# Altium PCB linkit-v4-0.3_6layers_smdonly.PcbDoc (part 3 of 5)
Units mil, origin at the board's own origin, x right, y up, seen from the top; angles counter-clockwise.
Board outline 2755.93 x 1377.98 mil, 6 copper layers (Top Layer, Int1 (GND), Int2 (Sign), Int3 (Sign), Int4 (PWR), Bottom Layer), stack 64.425 mil thick; 199 components, 156 nets, 686 pads, 678 vias.
Unrouted connection lines stored in the file: 1.
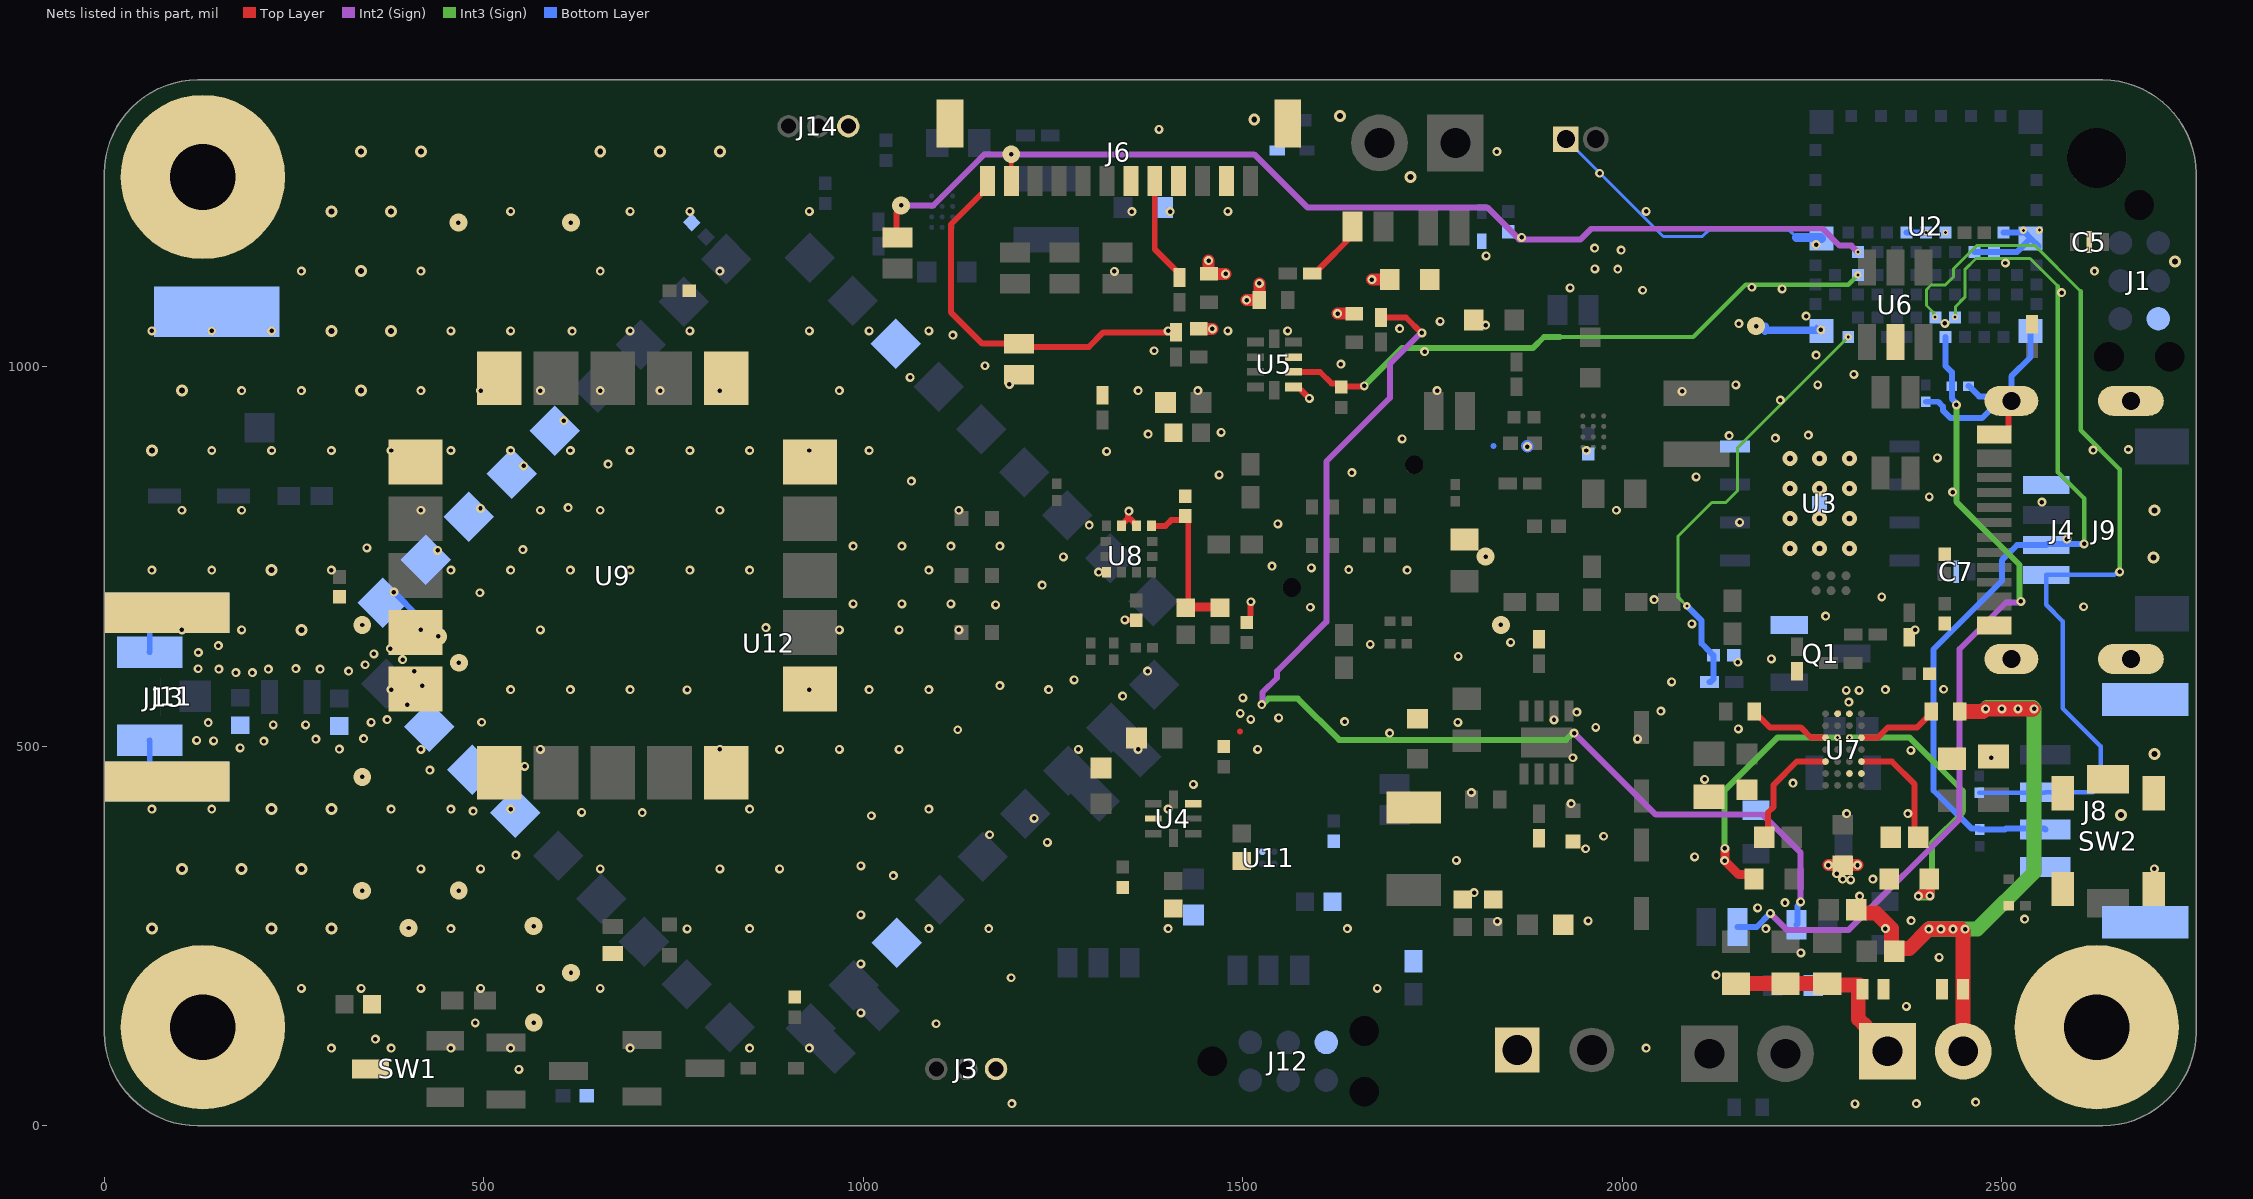
[diagram p6: the nets of this part, all layers, seen from the top]

## Part data (continued)
R25: library part "RES 1.6K 0201 1% 100PPM", "RES 1.6K 0201 1% 100PPM", Supplier Part Number 1=71-CRCW02011K60FKED, TOLERANCE=1%, PPM=100, Size=0201, Supplier 1=Mouser, Supplier 2=Digi-Key, Supplier Part Number 2=541-1.60KAABCT-ND
R26: library part RES-NC-0402, "Generic Resistor, Not Fitted", Manufacturer=YAGEO, Manufacturer_Part_Number=RC0402JR-070RL, Package=R0402, ComponentLink1Description=Datasheet, ComponentLink1URL=http://tunmcdsvn.tun.st.com/Component_Datasheet_Library/Trunk/Resistors/Yageo_Resistor_RC0402-series, Initial_Board_Reference=MB1274, Internal_Part_Number=MCD-00052, part_type=Resistor, Provided_By=SUBCO, status=Released
R31: library part "RES 0R 0402", "RES 0R 0402", Supplier Part Number 1=603-RC0402JR-070RL, Size=0402, Supplier 1=Mouser, Supplier 2=Digi-Key, Supplier Part Number 2=311-0.0JRCT-ND
R33 R34: "Thick Film Resistors - SMD 1/20watt 5.1Kohms 5% 200ppm", Manufacturer_Name=Vishay, Mouser Part Number=71-CRCW02015K10JNED, Datasheet Link=http://www.vishay.com/docs/20035/dcrcwe3.pdf, Height=0.28mm, Manufacturer_Part_Number=CRCW02015K10JNED, Mouser Price/Stock=https://www.mouser.com/Search/Refine.aspx?Keyword=71-CRCW02015K10JNED
R35: library part CRCW04020000Z0EEHP, "Thick Film Resistors - SMD CRCW 402 jumper", Manufacturer_Name=Vishay, Mouser Part Number=71-CRCW04020000Z0EEH, Arrow Part Number=CRCW04020000Z0EEHP, Arrow Price/Stock=https://www.arrow.com/en/products/crcw04020000z0eehp/vishay?utm_currency=USD&region=nac, Datasheet Link=http://www.vishay.com/docs/20035/dcrcwe3.pdf, Height=0.4mm, Manufacturer_Part_Number=CRCW04020000Z0EEHP, Mouser Price/Stock=https://www.mouser.co.uk/ProductDetail/Vishay-Dale/CRCW04020000Z0EEHP?qs=Imq1NPwxi74NTc567q7flQ%3D%3D
R36: "Res Thick Film 0201 453 Ohm 1% 1/20W ±100ppm/°C Molded SMD SMD Paper T/R", Case Code (Imperial)=0201, Case Code (Metric)=0603, Manufacturer="Vishay Dale", Manufacturer Part Number=CRCW0201453RFKED, Manufacturer_Name=Vishay, Max Operating Temperature=155°C, Max Power Dissipation=50mW, Min Operating Temperature=-55°C, Mouser Part Number=71-CRCW020120K0FKED, Package Quantity=10000, Supplier Part Number=71-CRCW0201453RFKED, Temperature Coefficient=100ppm/°C, TOLERANCE=1%, Voltage Rating=30V, Arrow Part Number=CRCW020120K0FKED, Arrow Price/Stock=https://www.arrow.com/en/products/crcw020120k0fked/vishay, Case/Package=0201, Category="Chip SMD Resistors", ComponentLink1Description=https://datasheet.ciiva.com/8935/crcw0201e3-8935846.pdf?src-supplier=Avnet, ComponentLink1URL=https://datasheet.ciiva.com/8935/crcw0201e3-8935846.pdf?src-supplier=Avnet, ComponentLink2Description=https://datasheet.ciiva.com/2580/crcw0201e3-2580478.pdf?src-supplier=Digikey, ComponentLink2URL=https://datasheet.ciiva.com/2580/crcw0201e3-2580478.pdf?src-supplier=Digikey, Contact Plating=Tin, Datasheet Link=http://www.vishay.com/docs/20035/dcrcwe3.pdf, Height=0.28mm, Lead Free="Lead Free", Length=0.024inch, Manufacturer_Part_Number=CRCW020120K0FKED, Mouser Price/Stock=https://www.mouser.co.uk/ProductDetail/Vishay-Dale/CRCW020120K0FKED?qs=1%252BOKmYoxJmkUY7PW7c9G2g%3D%3D, Number of Terminations=2, Packaging="Tape and Reel", Power Rating=50mW, Pricing="1=0,21, 10=0,091, 50=0,091, 100=0,063, 1000=0,043, 10000=0,029 (USD)", Radiation Hardening=No, RoHS=Yes, RoHS Compliant=Yes, Series=CRCW, Stock=8250, SUPPLIER=Mouser, Termination=SMD/SMT, Voltage Rating (DC)=30V, Weight=6E-06oz, Width=0.3mm
R37: "Thick Film Resistors - SMD 10 kOhms 50 mW 0201 1%", Manufacturer_Name=KEMET, Mouser Part Number=603-RC0201FR-7D10KL, Datasheet Link=http://www.yageo.com/documents/recent/PYu-RC0201_51_RoHS_L_8.pdf, Height=0.26mm, Manufacturer_Part_Number=RC0201FR-7D10KL, Mouser Price/Stock=https://www.mouser.co.uk/ProductDetail/YAGEO/RC0201FR-7D10KL?qs=F5EMLAvA7ICAEt2%2Fo%2FBSlA%3D%3D
R38: "Thick Film Resistors - SMD 0201 255ohm 1% HalogenFree AEC-Q200", Manufacturer_Name=Panasonic, Datasheet Link=https://industrial.panasonic.com/cdbs/www-data/pdf/RDA0000/AOA0000C301.pdf, Height=0.26mm, Manufacturer_Part_Number=ERJ-1GNF2550C
R39: "Thick Film Resistors - SMD 1/20watt 196ohms 1% 100ppm"
R40 R42: "Thick Film Resistors - SMD 1/20watt 470ohms 1% 200ppm", Manufacturer_Name=Panasonic, Mouser Part Number=667-ERJ-U02F4700X, Datasheet Link=https://industrial.panasonic.com/cdbs/www-data/pdf/RDP0000/AOA0000C334.pdf, Height=0.4mm, Manufacturer_Part_Number=ERJ-U02F4700X, Mouser Price/Stock=https://www.mouser.co.uk/ProductDetail/Panasonic/ERJ-U02F4700X?qs=CBysBIMljtjEviQOZxHkmQ%3D%3D
R41: "Thick Film Resistors - SMD 1/16watt 3.3Kohms 1% 100ppm", Manufacturer_Name=Vishay, Mouser Part Number=71-CRCW0402-3.3K-E3, Arrow Part Number=CRCW04023K30FKED, Arrow Price/Stock=https://www.arrow.com/en/products/crcw04023k30fked/vishay, Datasheet Link=http://www.vishay.com/docs/20035/dcrcwe3.pdf, Height=0.4mm, Manufacturer_Part_Number=CRCW04023K30FKED, Mouser Price/Stock=https://www.mouser.co.uk/ProductDetail/Vishay-Dale/CRCW04023K30FKED?qs=iv%252Be0Bc5VY2uvlCcTQHBWQ%3D%3D
R43 R44: "Thick Film Resistors - SMD 1/20watt 22ohms 1% 200ppm", Manufacturer_Name=Panasonic, Datasheet Link=https://industrial.panasonic.com/cdbs/www-data/pdf/RDP0000/AOA0000C334.pdf, Height=0.4mm, Manufacturer_Part_Number=ERJ-U02F22R0X
R45 R68: "Thick Film Resistors - SMD 36.5Kohm 1% 200ppm", Manufacturer_Name=Vishay, Datasheet Link=http://www.vishay.com/docs/20035/dcrcwe3.pdf, Height=0.28mm, Manufacturer_Part_Number=CRCW020136K5FNED
R46 R69: "Thick Film Resistors - SMD 0 Ohms 50mW 0201 1%", Manufacturer_Name=KEMET, Mouser Part Number=603-RC0201FR-070RL, Arrow Part Number=RC0201FR-070RL, Arrow Price/Stock=https://www.arrow.com/en/products/rc0201fr-070rl/yageo?region=nac, Datasheet Link=http://www.yageo.com/documents/recent/PYu-RC0201_51_RoHS_L_8.pdf, Height=0.26mm, Manufacturer_Part_Number=RC0201FR-070RL, Mouser Price/Stock=https://www.mouser.co.uk/ProductDetail/YAGEO/RC0201FR-070RL?qs=LWWr1WFOkdETHfAClQk8Xg%3D%3D
R47 R70: "Thick Film Resistors - SMD 1/20W 2.74Kohms 1% 200ppm", Manufacturer_Name=Vishay, Datasheet Link=http://www.vishay.com/docs/20035/dcrcwe3.pdf, Height=0.28mm, Manufacturer_Part_Number=CRCW02012K74FNED
R49: "Thick Film Resistors - SMD 1/16watt 49.9Kohms 1%", Manufacturer_Name=Vishay, Mouser Part Number=71-CRCW0402-49.9K-E3, Arrow Part Number=CRCW040249K9FKED, Arrow Price/Stock=https://www.arrow.com/en/products/crcw040249k9fked/vishay?region=nac, Datasheet Link=http://www.vishay.com/docs/20035/dcrcwe3.pdf, Height=0.4mm, Manufacturer_Part_Number=CRCW040249K9FKED, Mouser Price/Stock=https://www.mouser.co.uk/ProductDetail/Vishay-Dale/CRCW040249K9FKED?qs=hAuyw6LW%252BLhwjtjsHx%2FGDQ%3D%3D
R52 R53 R55: "Thick Film Resistors - SMD CRCW 402 jumper", Manufacturer_Name=Vishay, Mouser Part Number=71-CRCW04020000Z0EEH, Arrow Part Number=CRCW04020000Z0EEHP, Arrow Price/Stock=https://www.arrow.com/en/products/crcw04020000z0eehp/vishay?utm_currency=USD&region=nac, Datasheet Link=http://www.vishay.com/docs/20035/dcrcwe3.pdf, Height=0.4mm, Manufacturer_Part_Number=CRCW04020000Z0EEHP, Mouser Price/Stock=https://www.mouser.co.uk/ProductDetail/Vishay-Dale/CRCW04020000Z0EEHP?qs=Imq1NPwxi74NTc567q7flQ%3D%3D
R58: "Thick Film Resistors - SMD 10 MOhms 50mW 0201 1%", Manufacturer_Name=KEMET, Mouser Part Number=603-RC0201FR-0710ML, Arrow Part Number=RC0201FR-0710ML, Arrow Price/Stock=https://www.arrow.com/en/products/rc0201fr-0710ml/yageo, Datasheet Link=http://www.yageo.com/documents/recent/PYu-RC0201_51_RoHS_L_8.pdf, Height=0.26mm, Manufacturer_Part_Number=RC0201FR-0710ML, Mouser Price/Stock=https://www.mouser.com/Search/Refine.aspx?Keyword=603-RC0201FR-0710ML
R63: "Thick Film Resistors - SMD 1/20watt 100Kohms 5% 200ppm", Manufacturer_Name=Vishay, Mouser Part Number=71-CRCW0201100KJNED, Arrow Part Number=CRCW0201100KJNED, Arrow Price/Stock=https://www.arrow.com/en/products/crcw0201100kjned/vishay, Datasheet Link=http://www.vishay.com/docs/20035/dcrcwe3.pdf, Height=0.28mm, Manufacturer_Part_Number=CRCW0201100KJNED, Mouser Price/Stock=https://www.mouser.co.uk/ProductDetail/Vishay-Dale/CRCW0201100KJNED?qs=IQLUlsvFoXu8A8gHIw6owA%3D%3D
R65: library part CRCW04020000Z0ED, "Thick Film Resistors  - SMD 0402 0.063 W 0 Ohm Jumper", Case Code (Imperial)=0402, Case Code (Metric)=1005, Manufacturer 1=Vishay, Max Operating Temperature=155°C, Max Power Dissipation=63mW, Min Operating Temperature=-55°C, Package Quantity=10000, Ratings=AEC-Q200, Resistance=0mR, Resistor Type="Thick Film", Supplier Part Number 1=541-0.0JCT-ND, Temperature Coefficient=100ppm/°C, TOLERANCE=5%, Voltage Rating=50V, Case/Package=0402, Category 1="Chip SMD Resistors", ComponentLink1Description=https://datasheet.ciiva.com/3255/dcrcwe3-3255944.pdf?src-supplier=Avnet, ComponentLink1URL=https://datasheet.ciiva.com/3255/dcrcwe3-3255944.pdf?src-supplier=Avnet, ComponentLink2Description=https://datasheet.ciiva.com/3255/dcrcwe3-3255945.pdf?src-supplier=Avnet, ComponentLink2URL=https://datasheet.ciiva.com/3255/dcrcwe3-3255945.pdf?src-supplier=Avnet, ComponentLink3Description=https://datasheet.ciiva.com/2461/dcrcwe3-2461962.pdf?src-supplier=Digi-Key, ComponentLink3URL=https://datasheet.ciiva.com/2461/dcrcwe3-2461962.pdf?src-supplier=Digi-Key, ComponentLink4Description=https://datasheet.ciiva.com/7841/1720486-7841802.pdf?src-supplier=Element14, ComponentLink4URL=https://datasheet.ciiva.com/7841/1720486-7841802.pdf?src-supplier=Element14, ComponentLink5Description=https://datasheet.ciiva.com/2461/dcrcwe3-2461964.pdf?src-supplier=Digi-Key, ComponentLink5URL=https://datasheet.ciiva.com/2461/dcrcwe3-2461964.pdf?src-supplier=Digi-Key, ComponentLink6Description=https://datasheet.ciiva.com/7841/1697337-7841468.pdf?src-supplier=Element14, ComponentLink6URL=https://datasheet.ciiva.com/7841/1697337-7841468.pdf?src-supplier=Element14, ComponentLink7Description=https://datasheet.ciiva.com/16761/70200976-16761309.pdf?src-supplier=Allied+Electronics, ComponentLink7URL=https://datasheet.ciiva.com/16761/70200976-16761309.pdf?src-supplier=Allied+Electronics, ComponentLink8Description=https://datasheet.ciiva.com/26311/fld-crcw-e3-data-en-26311550.pdf?src-supplier=Distrelec, ComponentLink8URL=https://datasheet.ciiva.com/26311/fld-crcw-e3-data-en-26311550.pdf?src-supplier=Distrelec, Construction=Rectangular, Contact Plating=Tin, Depth=0.5mm, Description 1="CRCW Series 0402 0.063 W 0 Ohm Jumper Surface Mount Thick Film Chip Resistor", Features="Automotive AEC-Q200", Height=0.35mm, Lead Free="Lead Free", Length=1mm, Manufacturer Part Number 1=CRCW04020000Z0ED, Military Standard=Not, Number of Terminations=2, Packaging="Tape and Reel", Power Rating=63mW, Pricing 1="1=0,1, 10=0,029, 25=0,0208, 50=0,016, 100=0,0118, 250=0,009, 500=0,0072, 1000=0,0053, 5000=0,0038 (USD)", Radiation Hardening=No, Reach SVHC Compliant=Unknown, RoHS 1=Yes, RoHS Compliant=Yes, Series=CRCW, Size Code=0402, Stock 1=170588, Supplier 1=Digi-Key, Termination=SMD/SMT, Voltage Rating (DC)=50V, Weight=2.3E-05oz, Width=0.5mm
SW1: "Board Mount Hall Effect/Magnetic Sensors Integrated Digital Omnipolar, TMR, High Sensitivity Magnetic Switch, SOT23 Package, Ind Temp, 2Hz", Manufacturer_Name="Allegro MicroSystems", Mouser Part Number=462-CT8132BV-IS3, Datasheet Link=https://www.mouser.fr/datasheet/2/1115/Allegro_DS_CT813x_Datasheet_GS_FINAL_R2_v2-3441103.pdf, Height=1.4mm, Manufacturer_Part_Number=CT8132BV-IS3, Mouser Price/Stock=https://www.mouser.fr/ProductDetail/Allegro-MicroSystems/CT8132BV-IS3?qs=GBLSl2Akirsc7cUAudCqXg%3D%3D
SW2: "SW SPST PB 50MA 12V SMT CK variant", Manufacturer=C&K, Manufacturers Part Number="PTS820J2xM SMTR LFS", Supplier Part Number 1=611-PTS820J25MSMTR, Distributor 1=EBV, Distributor 2="Future Electronics", Supplier 1=Mouser, Supplier 2=Digi-Key, Supplier Part Number 2=CKN10505CT-ND
TP14 TP15 TP16 TP17: library part TestPoint-compact, "Test Point, Compact, SMT", Manufacturer=Keystone, PartNumber=5016, Supplier Part Number 1=36-5016TR-ND, CNHeader=FALSE, ComponentLink1Description="Datasheet URL", ComponentLink1URL=http://www.keyelco.com/userAssets/store/files/5016.PDF, CompType="Test Point", CT=TRUE, Green_EU RoHS=Passed, Green_EU RoHS-2=Incomplete, Green_Lifecycle=Active, Green_REACh=Passed, LatestRevisionDate=26/05/2017, MountType=SMT, PackageReference=Testpoint_Keystone_Compact, Publisher="Texas Instruments", RoHS=Y, Supplier 1=Digi-Key, Supplier 2=Mouser, Supplier Part Number 2=534-5016
U1: "Battery Management 800-mA linear batter y charger for one-ce", Manufacturer_Name="Texas Instruments", Mouser Part Number=595-BQ25176MDSGR, Arrow Part Number=BQ25176MDSGR, Arrow Price/Stock=https://www.arrow.com/en/products/bq25176mdsgr/texas-instruments?region=nac, Datasheet Link=https://www.ti.com/lit/gpn/bq25176m, Height=0.8mm, Manufacturer_Part_Number=BQ25176MDSGR, Mouser Price/Stock=https://www.mouser.co.uk/ProductDetail/Texas-Instruments/BQ25176MDSGR?qs=Y0Uzf4wQF3nVhcdITj52nA%3D%3D
U2: "IC ISP Smart Bluetooth Module", Manufacturer=InsightSIP, Manufacturers Part Number=ISP1807-LR-ST, Temp Max=85, Temp Min=-40, Supplier 1=Rutronik, Supplier 2=Mouser, Supplier Part Number 1=ISP1807-LR-ST, Supplier Part Number 2=359-ISP1807-LR-ST, Supplier Unit Price 1=8.5
U3: "IC MEM SERIAL NOR FLASH QSPI 128Mb/16MB 3.6V 166MHz WSON8 6X5", Manufacturer=ISSI, Supplier Part Number 1=2901145, Temp Max=105, Temp Min=-40, Distributor 1=EBV, Distributor 2="Future Electronics", Manufacturers Part Number=IS25LP128F-JKLE, Supplier 1=Farnell, Supplier 2=Mouser, Supplier Part Number 2=870-IS25LP128FJKLETR
U4: "Power Switch ICs - Power Distribution Low Input VTG Dual L oad Switch", Manufacturer_Name="Texas Instruments", Mouser Part Number=595-TPS22960RSER, Arrow Part Number=TPS22960RSER, Arrow Price/Stock=https://www.arrow.com/en/products/tps22960rser/texas-instruments?region=nac, Datasheet Link=https://www.ti.com/lit/ds/symlink/tps22960.pdf?ts=1638681846865&ref_url=https%253A%252F%252Fwww.google.com%252F, Height=0.6mm, Manufacturer_Part_Number=TPS22960RSER, Mouser Price/Stock=https://www.mouser.co.uk/ProductDetail/Texas-Instruments/TPS22960RSER?qs=EQxOuqCyzqQpKHLEcq5RSg%3D%3D
U5: "Analog to Digital Converters - ADC 16B ADC w/ Int MUX P GA Comp Osc & Ref A", Manufacturer_Name="Texas Instruments", Mouser Part Number=595-ADS1115IRUGR, Arrow Part Number=ADS1115IRUGR, Arrow Price/Stock=https://www.arrow.com/en/products/ads1115irugr/texas-instruments?utm_currency=USD&region=nac, Datasheet Link=https://www.ti.com/lit/ds/symlink/ads1115.pdf?ts=1601235703022&ref_url=https%253A%252F%252Fwww.ti.com%252Fproduct%252FADS1115%253FkeyMatch%253DADS1115IRUGR%2526tisearch%253DSearch-EN-everything%2526usecase%253DOPN, Height=0.4mm, Manufacturer_Part_Number=ADS1115IRUGR, Mouser Price/Stock=https://www.mouser.co.uk/ProductDetail/Texas-Instruments/ADS1115IRUGR?qs=IK5e5L0zOXhqw%2F8AHSSbuA%3D%3D
U6: "ESD Suppressors / TVS Diodes High Speed Interface Protection Low Cap", Manufacturer_Name=STMicroelectronics, Mouser Part Number=511-USBLC6-2SC6, Arrow Part Number=USBLC6-2SC6, Arrow Price/Stock=https://www.arrow.com/en/products/usblc6-2sc6/stmicroelectronics?utm_currency=USD&region=europe, Datasheet Link=http://www.st.com/st-web-ui/static/active/en/resource/technical/document/datasheet/CD00050750.pdf, Height=1.45mm, Manufacturer_Part_Number=USBLC6-2SC6, Mouser Price/Stock=https://www.mouser.co.uk/ProductDetail/STMicroelectronics/USBLC6-2SC6?qs=po45yt2pPpu%2FhNIlwQdTlg%3D%3D
U7: "Wireless Charging ICs Wireless Pwr Receivr A 595-BQ51003YFPR", Manufacturer_Name="Texas Instruments", Mouser Part Number=595-BQ51003YFPT, Arrow Part Number=BQ51003YFPT, Arrow Price/Stock=https://www.arrow.com/en/products/bq51003yfpt/texas-instruments?region=nac, Datasheet Link=http://www.ti.com/lit/gpn/BQ51003, Height=0.5mm, Manufacturer_Part_Number=BQ51003YFPT, Mouser Price/Stock=https://www.mouser.co.uk/ProductDetail/Texas-Instruments/BQ51003YFPT?qs=QCUnHQQYO1rX6GZ4rUhwCg%3D%3D
U8: "IC AXL Accel/temp SPI/I2C 12LGA", Manufacturer="Bosch Sensortec", Supplier Part Number 1=828-1081-1-ND, Temp Max=85, Temp Min=-40, Manufacturers Part Number=BMA400, Supplier 1=Digi-Key, Supplier 2=Mouser, Supplier Part Number 2=262-BMA400
U9: "GNSS / GPS Modules u-blox M10 GNSS antenna module ROM, TCXO, SAW, LNA LGA, 16x16 mm", Manufacturer_Name=U-Blox, Mouser Part Number=377-SAM-M10Q-00B, Datasheet Link=https://content.u-blox.com/sites/default/files/documents/SAM-M10Q_DataSheet_UBX-22013293.pdf, Height=6.8mm, Manufacturer_Part_Number=SAM-M10Q-00B, Mouser Price/Stock=https://www.mouser.co.uk/ProductDetail/u-blox/SAM-M10Q-00B?qs=vvQtp7zwQdOaA6LplTUKjg%3D%3D
U10 U13: "Switching Voltage Regulators 5.5-V buck-boost con verter with 75-nA op", Manufacturer_Name="Texas Instruments", Mouser Part Number=595-TPS63901YCJR, Arrow Part Number=TPS63901YCJR, Arrow Price/Stock=https://www.arrow.com/en/products/tps63901ycjr/texas-instruments?region=nac, Datasheet Link=https://www.ti.com/lit/ds/symlink/tps63901.pdf?ts=1658737279065&ref_url=https%253A%252F%252Fwww.ti.com%252Fproduct%252FTPS63901%253FkeyMatch%253DTPS63901YCJR%2526tisearch%253Dsearch-everything%2526usecase%253DOPN, Height=0.35mm, Manufacturer_Part_Number=TPS63901YCJR, Mouser Price/Stock=https://www.mouser.co.uk/ProductDetail/Texas-Instruments/TPS63901YCJR?qs=vvQtp7zwQdNZy3FE2e2hqg%3D%3D
U11: "Power Switch ICs - Power Distribution 5.5-V 2-A 60-mohm 10-nA leakage load A 595-TPS22916CNYFPT", Manufacturer_Name="Texas Instruments", Mouser Part Number=595-TPS22916BYFPR, Arrow Part Number=TPS22916BYFPR, Arrow Price/Stock=https://www.arrow.com/en/products/tps22916byfpr/texas-instruments?region=europe, Datasheet Link=http://www.ti.com/lit/gpn/tps22916, Height=0.5mm, Manufacturer_Part_Number=TPS22916BYFPR, Mouser Price/Stock=https://www.mouser.co.uk/ProductDetail/Texas-Instruments/TPS22916BYFPR?qs=EU6FO9ffTwcHQneHYjMKrg%3D%3D
U12: "Arribada SMD module Argos comunication with PA GR5504"

## Via types
v1: diameter 11.81, hole 5.91, Int1 (GND) to Int3 (Sign), tented both sides, 151 vias
v2: diameter 11.81, hole 5.91, Top Layer to Int1 (GND), tented both sides, 100 vias
v3: diameter 11.81, hole 5.91, Top Layer to Int3 (Sign), tented both sides, 63 vias
v4: diameter 11.81, hole 5.91, Top Layer to Int4 (PWR), tented both sides, 61 vias
v5: diameter 11.81, hole 5.91, Int1 (GND) to Bottom Layer, tented both sides, 58 vias
v6: diameter 11.81, hole 5.91, Int1 (GND) to Int2 (Sign), tented both sides, 38 vias
v7: diameter 15.75/15.75/15.75/15.75 (per signal layer), hole 7.87, Top Layer to Bottom Layer, tented both sides, 28 vias
v8: diameter 11.81, hole 5.91, Top Layer to Int2 (Sign), tented both sides, 18 vias
v9: diameter 11.81, hole 5.91, Int3 (Sign) to Bottom Layer, tented both sides, 17 vias
v10: diameter 11.81, hole 5.91, Int2 (Sign) to Int3 (Sign), tented both sides, 16 vias
v11: diameter 11.81, hole 5.91, Int2 (Sign) to Bottom Layer, tented both sides, 15 vias
v12: diameter 7.87, hole 3.94, Int3 (Sign) to Bottom Layer, tented both sides, 14 vias
v13: diameter 23.62, hole 5.91, Int1 (GND) to Bottom Layer, tented both sides, 13 vias
v14: diameter 19.68, hole 7.87, Top Layer to Bottom Layer, tented both sides, 12 vias
v15: diameter 7.87, hole 3.94, Int2 (Sign) to Bottom Layer, tented both sides, 11 vias
v16: diameter 11.81, hole 5.91, Int4 (PWR) to Bottom Layer, tented both sides, 9 vias
v17: diameter 15.75, hole 7.87, Top Layer to Bottom Layer, tented both sides, 7 vias
v18: diameter 8.9, hole 3.94, Top Layer to Int3 (Sign), tented both sides, 6 vias
v19: diameter 9.84, hole 3.94, Int3 (Sign) to Bottom Layer, tented both sides, 5 vias
v20: diameter 9.84, hole 3.94, Int2 (Sign) to Bottom Layer, tented both sides, 5 vias
v21: diameter 9.84, hole 3.94, Top Layer to Bottom Layer, tented both sides, 5 vias
v22: diameter 11.81, hole 5.91, Bottom Layer to Int4 (PWR), tented both sides, 4 vias
v23: diameter 7.87, hole 3.94, Top Layer to Bottom Layer, tented both sides, 3 vias
v24: diameter 23.62, hole 11.81, Top Layer to Bottom Layer, tented both sides, 3 vias
v25: diameter 23.62, hole 5.91, Top Layer to Int2 (Sign), tented both sides, 2 vias
v26: diameter 23.62, hole 5.91, Int3 (Sign) to Bottom Layer, tented both sides, 2 vias
v27: diameter 11.81, hole 5.91, Top Layer to Bottom Layer, tented both sides, 2 vias
v28: diameter 9.84, hole 3.94, Int1 (GND) to Bottom Layer, tented both sides, 2 vias
v29: diameter 7.87, hole 3.94, Int1 (GND) to Bottom Layer, tented both sides, 2 vias
v30: diameter 15.75, hole 7.87, Int2 (Sign) to Bottom Layer, tented both sides, 1 vias
v31: diameter 15.75, hole 7.87, Top Layer to Int2 (Sign), tented both sides, 1 vias
v32: diameter 6.65, hole 3.94, Int3 (Sign) to Bottom Layer, tented both sides, 1 vias
v33: diameter 23.62, hole 5.91, Bottom Layer to Int4 (PWR), tented both sides, 1 vias
v34: diameter 9.84, hole 3.94, Int2 (Sign) to Int3 (Sign), tented both sides, 1 vias
v35: diameter 6.65, hole 3.94, Top Layer to Int2 (Sign), tented both sides, 1 vias

## Nets (pads, with @x,y where several pads share a name; then routed paths per layer and width w, separated by ;. In a path a pad name is that pad's centre, name@x,y a point inside that pad or via, vN(x,y) a via of type N, cw(c..) or ccw(c..) an arc to the next point about the centre after c; other vN are vias at no path point)
ADC0: O7.2 R27.1 | length 1542.1
  Top Layer w7.87: R27.1@1681.81,1065.04 1714.96,1065.04 1735.3,1044.7 v8(1735.82,1044.7)
  Int2 (Sign) w7.87: v10(1525,555) 1525.75,555.75 1525.75,570.87 1545,590.12 1545,599.07 1610,664.07 1610,875.29 1693.64,958.93 1693.64,1003.64 1734.7,1044.7 v8(1735.82,1044.7) ; v10(1936.63,517.48) 2044.11,410 2184.94,410 2235,359.94 v11(2235,295)
  Int3 (Sign) w7.87: v10(1525,555) 1525.59,555 1533.55,562.96 1572.52,562.96 1626.87,508.61 1925.64,508.61 1934.5,517.48 v10(1936.63,517.48)
  Bottom Layer w7.87: O7.2@2229.5,265 2230.68,266.18 2230.68,289.62 2235,293.93 v11(2235,295)
ADC1: O8.2 R30.1 | length 86.6
  Top Layer w7.87: R30.1@1591.65,1122.91 1596.08,1122.91 1600.02,1126.85 1600.02,1128.52 1644.5,1173 O8.2@1644.5,1185
ADC2: J6.5 R32.1 | length 141
  Top Layer w7.87: J6.5@1384.02,1245 1384.02,1154.82 1416.81,1122.02 R32.1@1416.81,1117.59
ADC3: J6.12 O13.2 R51.1 | length 516.6
  Top Layer w7.87: J6.12@1163.54,1245 1163.54,1235.16 1157.64,1229.25 1157.15,1229.25 1115.34,1187.44 1115.34,1071.99 1156.84,1030.5 O13.2@1205,1030.5 1209.12,1026.38 1297.39,1026.38 1316.37,1045.35 R51.1@1411.97,1045.35
ADC_ALERT_RDY: R28.2 U2.64 U5.2 | length 813.1
  Top Layer w7.87: U5.2@1566.81,993.23 1601.77,993.23 1616.89,978.11 1625.67,978.11 R28.2@1630,973.78 ; R28.2@1630,973.39 R28.2@1630,973.78 ; v3(1660,975) 1659.19,974.19 1630.41,974.19 R28.2@1630,973.78
  Int3 (Sign) w5.91: 1917.56,1039.27 2093.43,1039.27 2162.37,1108.22 2297.64,1108.22 v19(2310.43,1121.01)
  Int3 (Sign) w7.87: v3(1660,975) 1710,1025 1882.57,1025 1896.84,1039.27 1917.56,1039.27
AGND: C14.2 C15.2 C16.2 C57.2 FB1.1 | length 141.9
  Top Layer w15.75: C57.2@1441.97,1050.31 1442.28,1050 v2(1460,1050) ; v2(1455,1140) 1455,1122.94 C16.2@1455.39,1122.55 v2(1477.34,1122.55) ; v2(1505,1087.91) C15.2@1521.81,1087.91 v2(1521.81,1110) ; v2(1625,1070) C14.2@1646.81,1070 ; v2(1670,1115) FB1.1@1693.43,1115
BAT_AN: C4.2 O5.2 U2.38 | length 1089.6
  Int2 (Sign) w7.87: v11(2195,280) 2216.74,258.26 2298.26,258.26 2444.33,404.33 2444.33,628.29 2505.52,689.48 2523.43,689.48 v10(2524.94,690.98)
  Int3 (Sign) w7.87: v9(2440,950) 2440,822.27 2523.43,738.84 2523.43,692.49 v10(2524.94,690.98)
  Bottom Layer w7.87: O5.2@2151.68,262.09 2168.77,262.09 2177.09,262.09 v11(2195,280) ; U2.38@2425.59,1039.32 2425.59,1001.42 2434.03,992.98 C4.2@2434.03,974.48 2434.03,958.1 2440,952.13 v9(2440,950)
BAT_READ_EN: R3.2 R22.2 U2.48 | length 581.1
  Int3 (Sign) w3.94: v19(2085,685) 2073.03,696.97 2073.03,776.46 2117.86,821.29 2136.29,821.29 2151.58,836.58 2151.58,893.26 v19(2297.64,1039.32)
  Bottom Layer w7.87: v19(2085,685) 2104.53,665.47 2104.53,635.47 2115.28,624.72 2115.28,624.33 2119.61,620 R22.2@2120,620 2120,588.43 2116.06,584.49 R3.2@2114.96,584.49
BMA_PWR: C37.2 R29.1 R31.2 U8.7 | length 215.5
  Top Layer w7.87: U8.7@1379.53,790.51 1398.24,790.51 1405.72,797.99 1417.93,797.99 1418.32,798.39 1420.04,798.39 C37.2@1423.12,801.46 ; C37.2@1424.37,803.51 1424.37,802.72 1424.37,800.21 1428.15,796.43 1428.15,692.72 1428.15,685.87 R29.1@1425,682.72
  Top Layer w11.81: R29.1@1425.63,683.35 R31.2@1469.37,683.35
BOOT1: C29.2 U7.C4 | length 155.6
  Top Layer w7.87: C29.2@2186.89,380 2191.89,385 2191.89,412.88 2199.4,420.4 2199.4,449.4 2230,480 U7.C4@2267.76,480
BOOT2: C34.2 U7.C1 | length 160.9
  Top Layer w7.87: U7.C1@2315,480 2355,480 2385.11,449.89 C34.2@2385.11,371.57
CLAMP1: C23.2 U7.E3 | length 334.7
  Top Layer w11.81: v3(2135.22,365.53) 2135.05,365.37 2135.05,349.75 v3(2134.88,349.58) 2153.43,331.03 2167.39,331.03 C23.2@2173.43,325
  Int3 (Sign) w7.87: v3(2134.88,349.58) 2134.88,442.13 2204.25,511.5 v18(2283.5,511.5)
CLAMP2: C36.2 U7.E2 | length 388.8
  Top Layer w7.87: C36.2@2404.57,325 C36.2@2405.12,324.45
  Top Layer w11.81: v3(2390.02,302.67) 2392.88,305.53 2402.67,305.53 v3(2405.12,303.09) 2405.12,308.16 C36.2@2405.12,324.45
  Int3 (Sign) w7.87: v18(2299.25,511.5) 2378.5,511.5 2448.18,441.82 2448.18,412.58 2407.76,372.16 2407.76,306.8 2405.12,304.15 v3(2405.12,303.09) ; v3(2390.02,302.67) v3@2390.23,302.88
  Int3 (Sign) w11.81: v3@2390.09,302.75 v3@2404.78,302.75
COIL-1: C24.1 C28.1 C43.1 D9.1 J7.1 | length 246.8
  Top Layer w19.68: C43.1@2150,187.44 C24.1@2215,187.44 C28.1@2255,187.44 ; C28.1@2270,187.44 2271.75,185.69 D9.1@2312.5,185.69 ; D9.1@2310.83,181.06 2310.83,141 2321.64,130.19 2321.64,125.93 J7.1@2349.2,98.37
COIL-2: C32.1 C33.1 C34.1 C35.1 C36.1 D10.1 J7.2 U7.B1 U7.B2 | length 890.1
  Top Layer w19.68: C32.1@2308.11,285 2308.11,284.42 2311.85,280.68 2333.94,280.68 2354.37,260.25 2354.37,233.74 C33.1@2358.11,230 2358.74,229.37 2358.74,230.44 2361.85,233.55 2378.01,233.55 v3(2403.74,259.28) ; v3@2408.65,259.59 v3@2419.41,259.59 ; v3(2419.68,259.28) v3(2435.63,259.28) 2446.53,259.28 2448.54,257.27 D10.1@2448.54,180 J7.2@2448.54,99.03 ; C35.1@2446.46,545.75 2475.05,545.75 v3(2478.74,549.44) v3(2500,549.44) v3(2521.26,549.44) v3@2540.83,549.44
  Int3 (Sign) w19.68: v3(2403.74,259.28) v3(2419.68,259.28) 2434.28,259.28 v3(2435.63,259.28) 2467.72,259.28 2542.51,334.07 v3(2542.51,549.44) 2540.83,551.12 2521.26,551.12 2500,551.12 v3@2480.43,551.12
  other v3: 2451.57,259.28
COMM1: C25.2 U7.E4 | length 108.2
  Top Layer w7.87: C25.2@2173.7,545.75 2194.45,525 2235,525 2248.5,511.5 U7.E4@2267.76,511.5
COMM2: C35.2 U7.E1 | length 108.2
  Top Layer w7.87: U7.E1@2315,511.5 2336.5,511.5 2350,525 2388.31,525 C35.2@2409.06,545.75
EXT_SCL: J8.2 J9.4 R62.2 U2.39 | length 1258.7
  Int3 (Sign) w3.94: v12(2411.85,1065.36) 2410.72,1066.49 2410.72,1070.81 2400.62,1080.9 2400.62,1101.65 2406.7,1107.72 2425.55,1107.72 2436.39,1118.56 2436.39,1129.3 2467.09,1160 2543.42,1160 2603.72,1099.7
  Int3 (Sign) w5.91: 2603.72,1099.7 2603.72,916.28 2655,865 v9(2655,730)
  Bottom Layer w5.91: R62.2@2470,438.98 2556.56,438.98 J8.2@2557.18,439.61 2619.61,439.61 2630,450 2630,500 2580,550 2580,665 2558.54,686.46 J9.4@2558.54,725.94 2648.28,725.94 2652.34,730 v9(2655,730)
EXT_SDA: J8.3 J9.3 R61.1 U2.37 | length 1191.8
  Int3 (Sign) w3.94: v12@2439.14,1066.64 2439.14,1079.47 2451.16,1091.49 2451.16,1127.97 2465.82,1142.63 2537.37,1142.63 2573.85,1106.15
  Int3 (Sign) w5.91: v12(2438.39,1065.89) v12@2439.14,1066.64 ; 2573.85,1106.15 2573.85,861.15 2608.22,826.78 v9(2608.22,766.87)
  Bottom Layer w7.87: J8.3@2557.18,390.39 2556.02,391.55 2505.34,391.55 2504.29,390.5 R61.1@2470.83,390.5 2469.81,391.52 2460.31,391.52 2410,441.84 2410,627.76 2500,717.76 2500,745 2520,765 2558.23,765 J9.3@2558.54,765.32 2560.1,766.87 v9(2608.22,766.87)
GND: BT1.- C1.2 C3.1 C4.1 C5.3 C6.1 C7.3 C8.2 C9.1 C10.2 C11.1 C12.1 C13.2 C17.1 C18.1 C19.1 C20.2 C21.2 C22.2 C26.2 C27.2 C30.2 C31.2 C37.1 C38.1 C39.2 C40.1 C44.2 C45.1 C46.2 C47.1 C49.1 D7.2 D8.2 D9.2 D10.2 FB1.2 FB2.2 FB3.2 FB4.2 FB5.2 FB6.2 J1.5 J2.1 J3.1 J4.A1_B12 J4.B1_A12 J4.SHIELD J5.1 J6.2 J6.4 J6.6 J6.13 J6.14 J8.4 J8.MP1 J8.MP2 J9.1 J11.1 J11.2 J12.5 J13.2 J14.1 MH2.1 MH3.1 MH4.1 O13.1 Q1.2 R6.1 R7.1 R10.1 R11.1 R12.1 R18.1 R19.1 R20.1 R21.1 R22.1 R26.1 R33.1 R34.1 R37.2 R39.2 R57.1 R58.1 R59.2 R60.2 R63.2 R65.1 R67.1 SW1.3 SW2.1 SW2.G1 SW2.G2 SW2.G3 SW2.G4 U2.1 U2.7 U2.14 U2.16 U2.18 U2.21 U2.23 U2.24 U2.25 U2.31 U3.4 U3.9 U4.3 U4.6 U5.1 U5.3 U6.2 U7.G2 U7.G3 U8.1 U8.8 U8.9 U9.1 U9.4 U9.5 U9.6 U9.10 U9.11 U9.15 U9.16 U9.20 U11.B1 U12.6 U12.13 U12.14 U12.15 U12.16 U12.17 U12.19 U12.20 U12.21 U12.29 | length 1385.2
  Top Layer w3.94: U7.G3@2283.5,542.99 U7.G3@2286.14,545.63
  Top Layer w7.56: U8.1@1320.32,729.49 U8.1@1320.47,729.49
  Top Layer w7.87: v2(1310,729.49) U8.1@1320.32,729.49 ; U8.9@1340.16,790.51 1340.16,791.5 1348.49,799.83 1348.49,808.49 v2(1350,810) ; v2(1344.76,666.77) 1345.03,666.5 1359.43,666.5 C38.1@1359.71,666.23 ; 1351.51,799.83 1359.84,791.5 U8.8@1359.84,790.51 ; 1496.57,519.69 1496.63,519.74 ; v2@1496.63,543.49 v2(1496.68,543.54) ; 1510,673.38 1510.27,673.65 1510.27,690.25 v2(1510.53,690.52) ; U5.1@1566.81,973.54 1572.22,973.54 1574.76,971 1575.16,971 v2(1587.69,958.48) ; J4.B1_A12@2500.71,911.06 2508.58,918.94 2508.58,951.22 J4.SHIELD@2512.52,955.16
  Top Layer w15.75: v2(2271.34,343.58) FB2.2@2290.34,343.58 v2(2309.81,343.58) ; J4.B1_A12@2489.88,911.06 J4.B1_A12@2500.71,911.06
  Bottom Layer w3.94: J2.1@1925.63,1300 2053.96,1171.67 2105.41,1171.67 2113.74,1180 2219.96,1180 2229.36,1170.6 ; U2.1@2255.77,1053.63 U2.1@2262.2,1047.2
  Bottom Layer w7.87: J11.1@60,507.95 60.04,507.91 60.04,476.42 J13.2@82.68,453.78 ; J11.2@60,624.09 J11.2@60,624.09 60.04,653.58 J13.2@82.68,676.22 ; v5(381.69,703.05) 381.95,703.05 384.79,700.21 411.29,673.71 v13(440,645) ; 1830.1,895.41 1830.51,895.83 ; U2.14@2374.41,1177.12 v23(2400,1177.12) ; C3.1@2400,953.98 2416.02,953.98 2422.28,947.72 2422.28,942.66 2432.66,932.28 2473.9,932.28 2496.77,955.16 J4.SHIELD@2512.52,955.16 ; C4.1@2456.08,974.48 2456.87,974.48 2470.16,961.18 2506.49,961.18 J4.SHIELD@2512.52,955.16 ; U2.21@2463.98,1151.53 U2.23@2489.57,1151.53 2520.08,1151.53 U2.25@2537.79,1169.24 ; U2.24@2502.36,1177.12 2529.92,1177.12 U2.25@2537.79,1169.24 ; U2.31@2537.79,1047.2 2537.79,1012.79 2512.52,987.52 J4.SHIELD@2512.52,955.16 ; U2.25@2548.42,1158.62 U2.25@2537.79,1169.24
  Bottom Layer w10: 2187.99,1047.2 2181.56,1053.63 v13(2176.23,1053.63) v13@2187.99,1053.63 ; 2187.99,1048.33 U2.1@2261.07,1048.33
  Bottom Layer w11.81: 2229.36,1170.6 2260.85,1170.6 U2.7@2262.2,1169.24
  Bottom Layer w15.75: v9@1874.17,895.83 v9(1875,895)
  other v1: 2306.53,29.03 2387.32,29.21 2465.5,31.26 377.95,102.36 456.69,102.36 850.39,102.36 929.13,102.36 2031.5,102.36 259.84,181.1 338.58,181.1 417.32,181.1 496.06,181.1 574.8,181.1 653.54,181.1 1677.17,181.1 456.69,259.84 767.91,259.65 850.39,259.84 1086.62,259.84 1165.36,259.84 1637.8,259.84 2188.98,259.84 2346.46,259.84 1955,270 1039.58,329.72 417.32,338.58 496.06,338.58 653.54,338.58 811.02,338.58 889.76,338.58 1166.54,383.57 1225,405 62.99,417.32 141.73,417.32 377.95,417.32 456.69,417.32 535.43,417.32 850.39,417.32 1086.62,417.32 1401.58,417.32 1801.17,439.22 1935,485 417.32,496.06 574.8,496.06 811.02,496.06 889.76,496.06 968.51,496.06 1047.25,496.06 1283.47,496.06 1362.21,496.06 1519.69,496.06 2153.03,522.92 1965,525 1910,535 1510.5,535.51 1547.23,537.63 1940,545 1500.01,563.87 768.12,574.46 377.95,574.8 535.43,574.8 614.17,574.8 692.91,574.8 929.13,574.8 1007.88,574.8 1086.62,574.8 1244.1,574.8 2346.46,574.8 2423.22,575.24 2152.22,610.81 1667.94,634.42 102.36,653.54 181.1,653.54 417.32,653.54 574.8,653.54 968.51,653.54 1047.25,653.54 1125.99,653.54 2385.83,653.54 871.79,656.37 62.99,732.28 141.73,732.28 299.21,732.28 456.69,732.28 535.43,732.28 614.17,732.28 692.91,732.28 771.65,732.28 850.39,732.28 1086.62,732.28 1716.54,732.28 102.36,811.02 181.1,811.02 417.32,811.02 574.8,811.02 653.54,811.02 811.02,811.02 1125.99,811.02 1063.48,849.52 1320.52,888.66 141.73,889.76 220.47,889.76 299.21,889.76 377.95,889.76 456.69,889.76 535.43,889.76 614.17,889.76 692.91,889.76 771.65,889.76 850.39,889.76 929.13,889.76 1007.88,889.76 2666.8,891.07 1471.53,913.51 2078.73,967.59 181.1,968.51 259.84,968.51 417.32,968.51 496.06,968.51 574.8,968.51 653.54,968.51 732.28,968.51 811.02,968.51 968.51,968.51 1362.21,968.51 1440.95,968.51 1755.91,968.51 2149.72,976.22 1192.61,976.83 62.99,1047.25 141.73,1047.25 220.47,1047.25 456.69,1047.25 535.43,1047.25 771.65,1047.25 929.13,1047.25 1007.88,1047.25 1086.62,1047.25 1401.58,1047.25 259.84,1125.99 417.32,1125.99 653.54,1125.99 811.02,1125.99 1330.87,1125.85 2622.05,1125.99 535.43,1204.73 692.91,1204.73 771.65,1204.73 929.13,1204.73 1480.32,1204.73 1389.63,1312.9
  other v2: 546.22,74.41 357.21,114.23 488.86,135.63 996.94,149 2374.21,157.34 1194.67,195.19 996.94,213.48 2417.3,221.86 2380.41,270.38 996.94,277.96 2178.28,287.28 2290.34,325 996.94,342.44 1242.72,373.49 1975.47,381.6 1010.86,408.57 1435,450 2380.02,494.7 1124.52,521.87 1634.16,532.5 2050.66,546.42 1341.64,566.13 1180,580 1277.94,587.6 1374.57,599.19 2196.41,615.28 1852.75,637.06 2091.72,661.45 2267.8,671.53 1588.97,683.25 1174.34,686.5 986.55,687.61 1051.03,687.61 1115.51,687.61 2341.79,697.07 1235.69,712.37 1590.27,735.27 1538.48,737.5 1263.73,749.66 346.07,761.33 986.55,763.75 1051.03,763.75 1115.51,763.75 1179.98,763.75 1297.72,791.47 1546.19,792.99 2404.36,828.53 2435,835 1468.91,857.73 2415,880 1710,905 2201.75,905.92 2245,910 1375.39,911.41 2208.17,955.99 2305,990 1160.39,1001.41 1629.3,1003.42 2255.27,1015.27 1383.1,1021.17 2153.41,1056.91 2425.04,1057.36 2242.05,1066.66 2578.74,1097.88 2210.53,1102.74 1931.24,1103.98 1963.71,1129.05 1820.68,1146.09 1998.44,1153.72 1867.32,1170.57 1353.77,1204.41 1970,1255
  other v3: 628.86,413 708.86,412.82 1639.6,732.84 616.49,1046.89 692.91,1047.25 1404.3,1204.6
  other v5: 299.21,102.36 535.43,102.36 692.91,102.36 2700.79,338.58 542.37,356.61 486.09,414.55 429.01,468.73 554,473.65 309.76,496.28 179.18,497.89 144.06,507.11 210.5,506.76 121.95,507.8 279.01,509.41 341.77,510.21 222.73,528.31 265.49,528.31 137.12,531.31 351.58,531.59 497.14,531.77 372.87,535.09 399.43,554.82 418.77,580.06 173.6,597.03 195.17,597.03 322.18,599.24 408.39,598.97 123.79,602.22 151.08,601.88 216.24,601.69 252.53,602.45 284.37,601.69 343.65,607.49 393.13,614.23 355.42,621.8 124.02,623.64 377.14,628.71 150.5,632.74 494.85,702.36 439.41,758.12 551.54,759.05 495.79,813.56 611.35,814.5 552.48,869.63 663.99,871.81 605.43,929.13 1061.83,986.08 1118.11,1041.66 2031.5,1204.73 1834.65,1283.47
  other v6: 1195.71,29.39 1095.97,134.57 2123.65,198.54 1835.37,269.57 2530.11,272.35 2214.31,294.29 1804.68,307.34 2330,325 1781.46,349.84 2095.26,354.36 1951.76,365.12 2295.45,411.42 2376.23,411.42 1932.52,424.62 2224.85,451.71 2108.33,456.64 2486.3,484.87 2020,510 1783.43,531.63 2065,585 1783.84,618.59 2607.65,683.93 2042.01,693.37 2585.8,772.98 2552.76,821.7 1643.62,860.74 2620.32,890.14 2140.6,909.4 2257.46,976.09 1739.54,1019.92 2261.62,1048.64 1706.7,1050.41 1760,1060 2026.62,1100.89 2170.65,1104.82 1993.99,1128.72 2504.58,1136.77 1963.43,1156.41
  other v7: 62.99,259.84 220.47,259.84 299.21,259.84 102.36,338.58 181.1,338.58 259.84,338.58 2656.86,409.84 220.47,417.32 299.21,417.32 2700.99,489.86 259.84,653.54 220.47,732.28 2699.49,748.7 2700.79,811.02 62.99,889.76 102.36,968.51 338.58,968.51 299.21,1047.25 377.95,1047.25 338.58,1125.99 2728.27,1139.01 299.21,1204.73 377.95,1204.73 338.58,1283.47 417.32,1283.47 653.54,1283.47 732.28,1283.47 811.02,1283.47
  other v8: 1693.54,517.44 2298.49,558.26 2295,573.67 2311.93,573.67 2255.32,1161.07
  other v9: 2235.22,228 2312.73,302.72 2300.64,324.11 2282.34,332.17
  other v10: 1401.58,259.84 2154.65,794.93 1992.13,811.02 2097.21,855.04 1952.76,889.76 1480.32,1047.25 1559.06,1047.25
  other v11: 1820,1055
  other v13: 565.94,135.97 615,201.73 401.14,260.7 565.7,263.27 339.84,309.76 467.14,310 339.96,459.88 467.26,610.12 339.96,659.88 466.75,1190.04 614.88,1190.04
  other v14: 2220.63,760.94 2260,760.94 2299.37,760.94 2220.63,800.31 2260,800.31 2299.37,800.31 2220.63,839.68 2260,839.68 2299.37,839.68 2220.63,879.06 2260,879.06 2299.37,879.06
  other v17: 1720.79,1249.87 1515.1,1325.8 1627.88,1330.6
  other v26: 1840,660 1820,750
  other v28: 2528.36,1179.74 2549.38,1179.98
  other v29: 2425.59,1177.12
GPIO: J6.11 O10.1 U2.9 | length 1433.3
  Top Layer w5.77: v25(1195,1280) J6.11@1195.04,1245 J6.11@1195.04,1245
  Top Layer w7.87: O10.1@1045,1170.5 1043.85,1171.65 1043.85,1202.36 1050,1208.51 v25(1050,1212.77)
  Int2 (Sign) w7.87: v25(1050,1212.77) 1092.52,1212.77 1159.75,1280 1515,1280 1585,1210 1822.03,1210 1864.08,1167.95 1917.56,1167.95 1944.99,1167.95 1958.92,1181.88 2263.83,1181.88 2286.03,1159.68 2301.75,1159.68 v15(2310.27,1151.16)